# EAGLE board untitled (EAGLE 9.3.0)
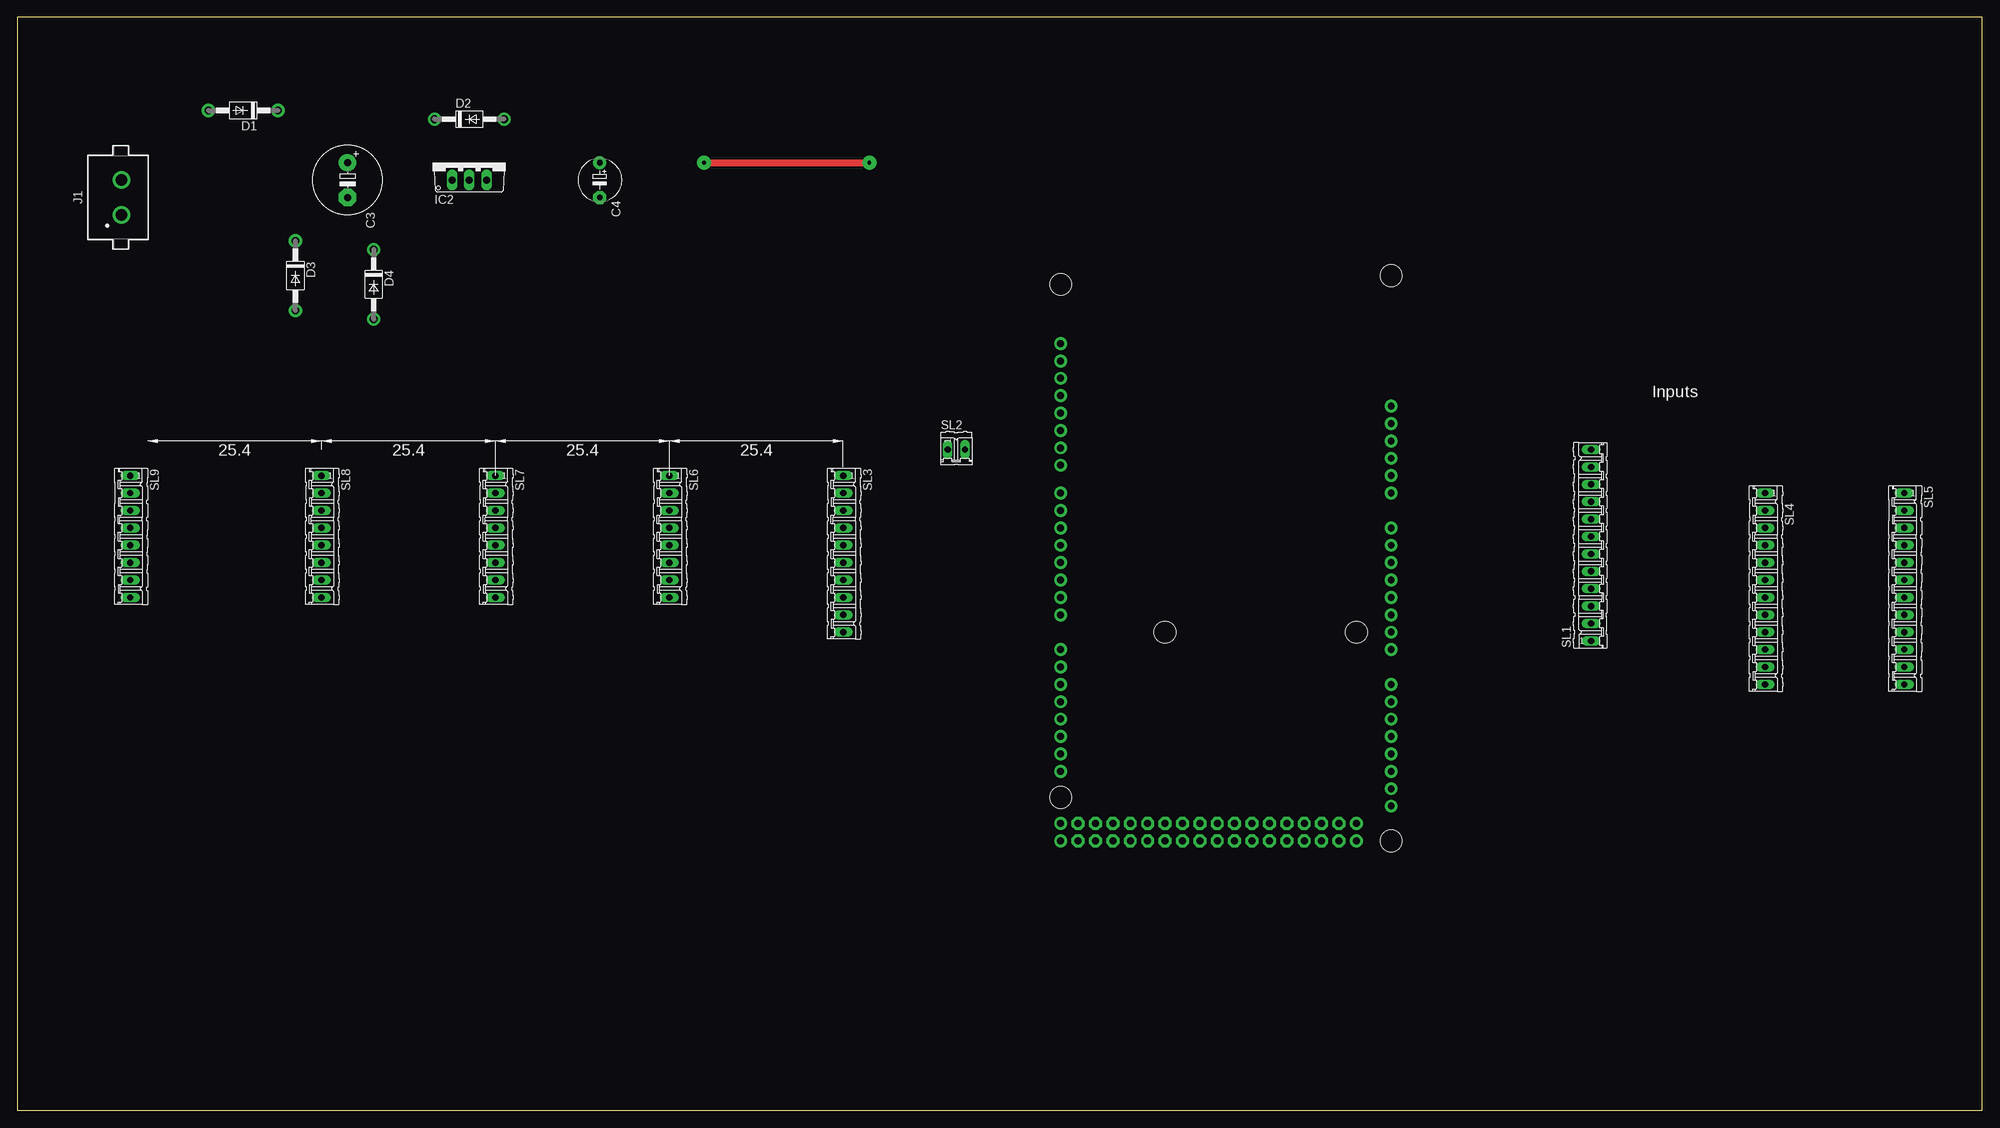
[diagram p0: board, top side]
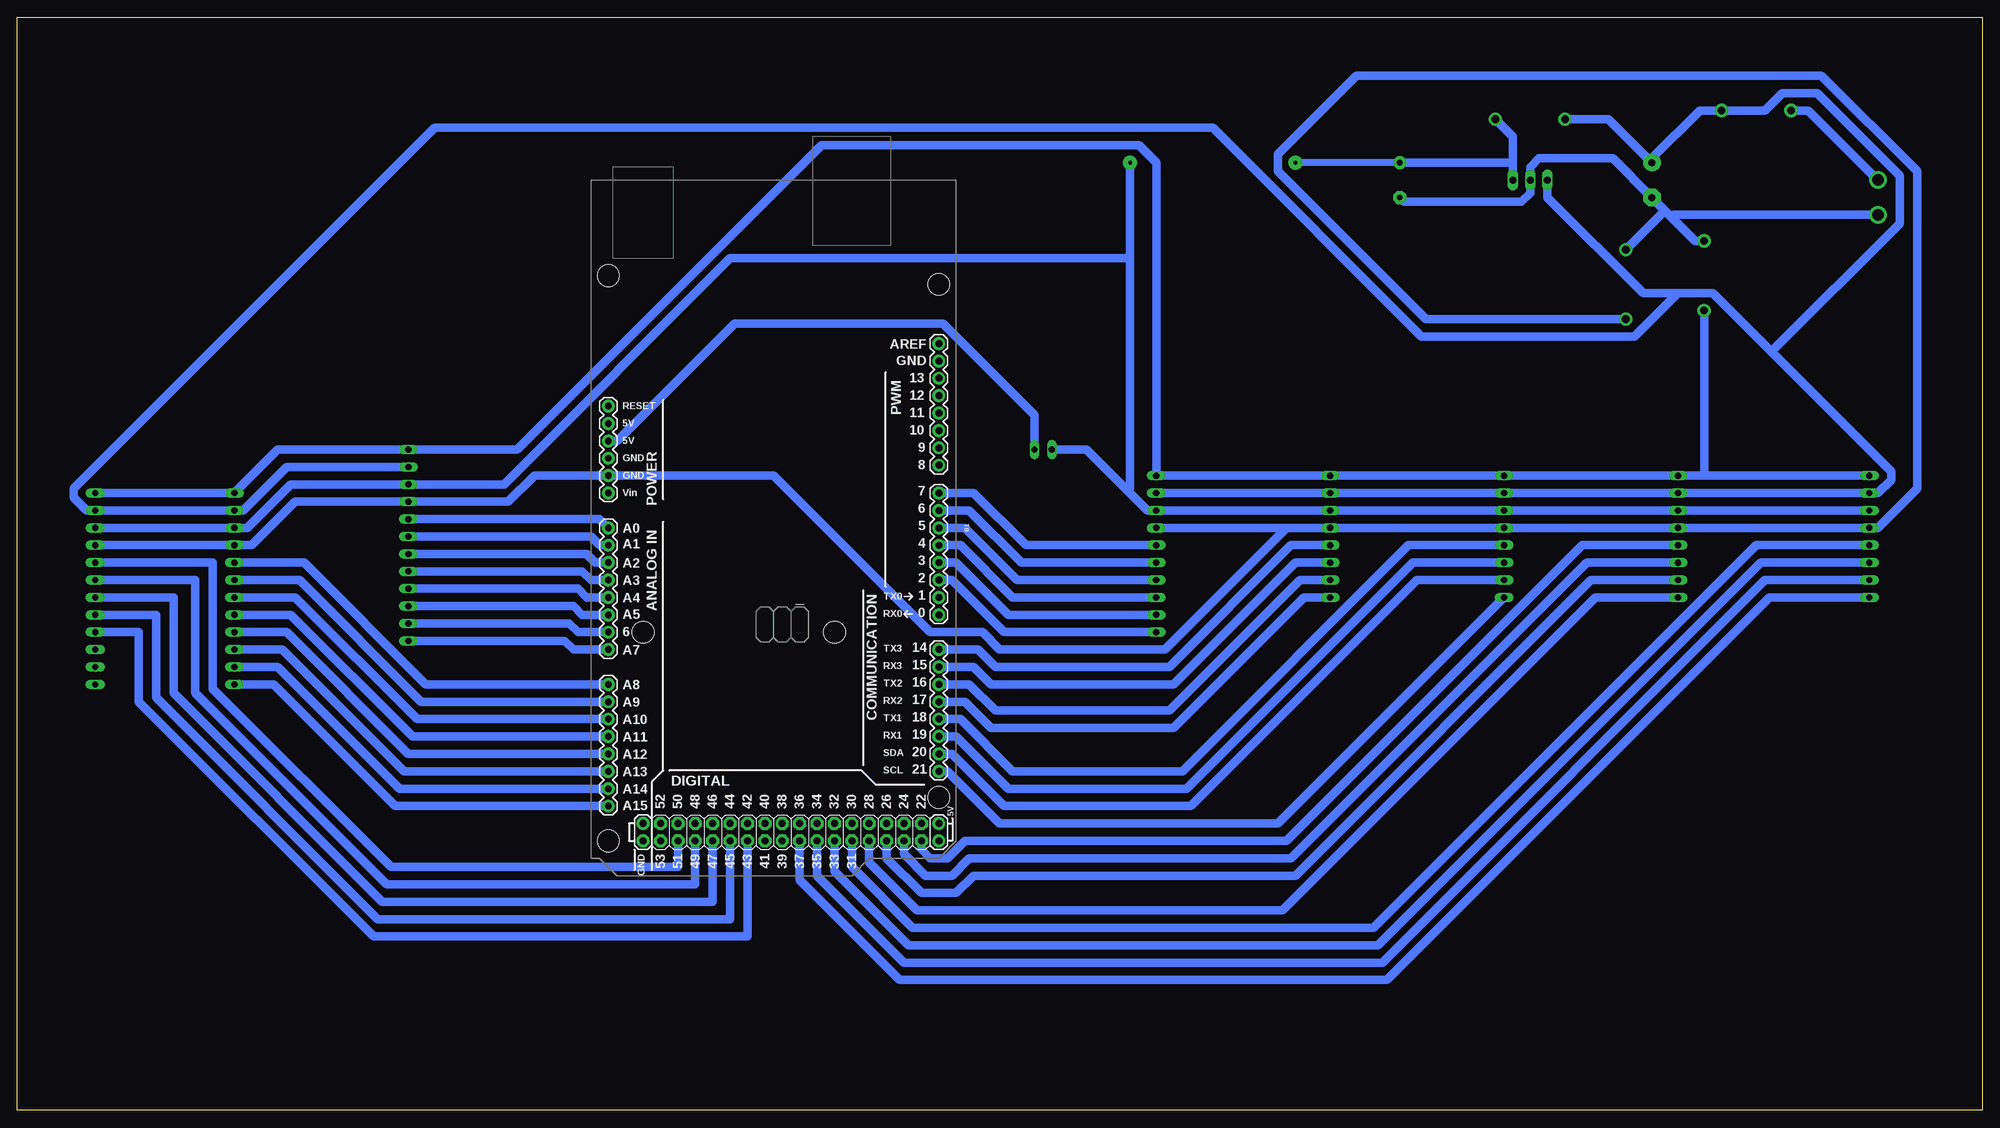
[diagram p1: board, bottom side, seen from below]

Size 287 x 159.69 mm. Coordinates in mm from the lower left corner, seen from the top.
Outline: 0,0 287,0 287,159.69 0,159.69 0,0
Copper layers (1*16): Top 0.035mm / dielectric 1.5mm / Bottom 0.035mm
Design rules "default *": minimum track width 50mil, minimum drill 0.35mm, track to track 35mil, track to pad 30mil, pad to pad 6mil, via to via 6mil, smd to smd 6mil, copper to edge 40mil, drill to drill 6mil, minimum pad ring 10mil, minimum via ring 8mil, stop-mask expansion 4mil, vias tented up to drill 0mil, thermal gap 10mil

## Footprints (pad centres in the part's own frame; a part is rotated, then mirrored left to right if it is on the bottom)
ARDUINO_MEGA = drill 1.016 pad 1.88: 0 13.97,24.13; 1 11.43,24.13; 2 8.89,24.13; 3 6.35,24.13; 3.3V -13.97,-24.13; 4 3.81,24.13; 5 1.27,24.13; 5V@0 -11.43,-24.13; 5V@1 44.45,24.13; 5V@2 46.99,24.13; 6 -1.27,24.13; 7 -3.81,24.13; 8 -7.874,24.13; 9 -10.414,24.13; 10 -12.954,24.13; 11 -15.494,24.13; 12 -18.034,24.13; 13 -20.574,24.13; 14 19.05,24.13; 15 21.59,24.13; 16 24.13,24.13; 17 26.67,24.13; 18 29.21,24.13; 19 31.75,24.13; 20 34.29,24.13; 21 36.83,24.13; A0 1.27,-24.13; A1 3.81,-24.13; A2 6.35,-24.13; A3 8.89,-24.13; A4 11.43,-24.13; A5 13.97,-24.13; A6 16.51,-24.13; A7 19.05,-24.13; A8 24.13,-24.13; A9 26.67,-24.13; A10 29.21,-24.13; A11 31.75,-24.13; A12 34.29,-24.13; A13 36.83,-24.13; A14 39.37,-24.13; A15 41.91,-24.13; AREF -25.654,24.13; GND@0 -8.89,-24.13; GND@1 -6.35,-24.13; GND@2 44.45,-19.05; GND@3 46.99,-19.05; GND@4 -23.114,24.13; RESET -16.51,-24.13; VIN -3.81,-24.13 | drill 1.016 pad 1.88 octagon: 22 44.45,21.59; 23 46.99,21.59; 24 44.45,19.05; 25 46.99,19.05; 26 44.45,16.51; 27 46.99,16.51; 28 44.45,13.97; 29 46.99,13.97; 30 44.45,11.43; 31 46.99,11.43; 32 44.45,8.89; 33 46.99,8.89; 34 44.45,6.35; 35 46.99,6.35; 36 44.45,3.81; 37 46.99,3.81; 38 44.45,1.27; 39 46.99,1.27; 40 44.45,-1.27; 41 46.99,-1.27; 42 44.45,-3.81; 43 46.99,-3.81; 44 44.45,-6.35; 45 46.99,-6.35; 46 44.45,-8.89; 47 46.99,-8.89; 48 44.45,-11.43; 49 46.99,-11.43; 50 44.45,-13.97; 51 46.99,-13.97; 52 44.45,-16.51; 53 46.99,-16.51 | hole 3.2: -34.29,24.13; -35.56,-24.13; 16.51,8.89; 16.51,-19.05; 40.64,24.13; 46.99,-24.13
E5-10,5 = drill 1.016 pad 2.54: + -2.54,0 | drill 1.016 pad 2.54 octagon: - 2.54,0
E5-6 = drill 0.813 pad 1.905: + -2.54,0 | drill 0.813 pad 1.905 octagon: - 2.54,0
DO41-10 = drill 1.118 pad 1.93: A 5.08,0; C -5.08,0
TO220V = drill 1.016 long: 1 -2.54,-2.54; 2 0,-2.54; 3 2.54,-2.54
691305530002 = drill 1.7: 1 -2.54,0; 2 2.54,0
12P = drill 0.914 long: 1 -13.97,0; 2 -11.43,0; 3 -8.89,0; 4 -6.35,0; 5 -3.81,0; 6 -1.27,0; 7 1.27,0; 8 3.81,0; 9 6.35,0; 10 8.89,0; 11 11.43,0; 12 13.97,0
02P = drill 0.914 long: 1 -1.27,0; 2 1.27,0
10P = drill 0.914 long: 1 -11.43,0; 2 -8.89,0; 3 -6.35,0; 4 -3.81,0; 5 -1.27,0; 6 1.27,0; 7 3.81,0; 8 6.35,0; 9 8.89,0; 10 11.43,0
08P = drill 0.914 long: 1 -8.89,0; 2 -6.35,0; 3 -3.81,0; 4 -1.27,0; 5 1.27,0; 6 3.81,0; 7 6.35,0; 8 8.89,0

## Placement (x,y rotation side)
B1  ARDUINO_MEGA_R3FULL  [ARDUINO_MEGA]  176.53,86.36 270 bottom
C3  [E5-10,5]  48.26,135.89 270 top
C4  [E5-6]  85.09,135.89 270 top
D1  1N4004  [DO41-10]  33.02,146.05 180 top
D2  1N4004  [DO41-10]  66.04,144.78 0 top
D3  1N4004  [DO41-10]  40.64,121.92 270 top
D4  1N4004  [DO41-10]  52.07,120.65 270 top
IC2  786TV  [TO220V]  66.04,138.43 0 top
J1  [691305530002]  15.24,133.35 90 top
SL1  [12P]  229.87,82.55 90 top
SL2  [02P]  137.16,96.52 0 top
SL3  [10P]  120.65,81.28 270 top
SL4  [12P]  255.27,76.2 270 top
SL5  [12P]  275.59,76.2 270 top
SL6  [08P]  95.25,83.82 270 top
SL7  [08P]  69.85,83.82 270 top
SL8  [08P]  44.45,83.82 270 top
SL9  [08P]  16.51,83.82 270 top

## Library data of the parts
B1 = SparkFun-Boards
C3 C4 = BeagleBone_Blue_R3
D1-D4 = adafruit
IC2 = linear
J1 = Wurth_Connectors_WR-TBL Pluggable Connector; DATASHEET-URL: https://www.we-online.com/catalog/datasheet/691305530002.pdf; IR-UL: 16A; MOUNT: THT; PART-NUMBER: 691305530002; PINS: 2; PITCH: 5.08mm; TYPE: Vertical; WORKING-VOLTAGE-UL: 300V (AC)
SL1-SL9 = con-amp-quick; OC_FARNELL: unknown; OC_NEWARK: unknown

## Nets
GND: B1.GND@1 D4.A SL1.9 SL3.4 SL4.4 SL5.4 SL6.4 SL7.4 SL8.4 SL9.4
N$1: B1.A7 SL1.1
N$2: B1.A6 SL1.2
N$3: B1.A5 SL1.3
N$4: B1.A4 SL1.4
N$5: B1.A3 SL1.5
N$6: B1.A2 SL1.6
N$7: B1.A1 SL1.7
N$8: B1.A0 SL1.8
N$9: D3.A SL1.12 SL3.1 SL4.1 SL5.1 SL6.1 SL7.1 SL8.1 SL9.1
N$10: D1.A J1.2
N$11: C3.+ D1.C D2.C IC2.1 SL1.11 SL3.2 SL4.2 SL5.2 SL6.2 SL7.2 SL8.2 SL9.2
N$12: C4.+ D2.A IC2.3 SL1.10 SL2.1 SL3.3 SL4.3 SL5.3 SL6.3 SL7.3 SL8.3 SL9.3
N$13: B1.2 SL3.10
N$14: C3.- C4.- D3.C D4.C IC2.2 J1.1
N$15: B1.3 SL3.9
N$16: B1.5V@0 SL2.2
N$17: B1.4 SL3.8
N$18: B1.5 SL3.7
N$19: B1.6 SL3.6
N$20: B1.7 SL3.5
N$21: B1.A8 SL4.5
N$22: B1.A9 SL4.6
N$23: B1.A10 SL4.7
N$24: B1.A11 SL4.8
N$25: B1.A12 SL4.9
N$26: B1.A13 SL4.10
N$27: B1.A14 SL4.11
N$28: B1.A15 SL4.12
N$29: B1.18 SL7.5
N$30: B1.14 SL6.5
N$31: B1.51 SL5.5
N$32: B1.49 SL5.6
N$33: B1.47 SL5.7
N$34: B1.45 SL5.8
N$35: B1.43 SL5.9
N$39: B1.21 SL7.8
N$40: B1.15 SL6.6
N$42: B1.17 SL6.8
N$43: B1.20 SL7.7
N$46: B1.19 SL7.6
N$49: B1.31 SL9.5
N$50: B1.33 SL9.6
N$51: B1.35 SL9.7
N$52: B1.37 SL9.8
N$53: B1.23 SL8.5
N$54: B1.25 SL8.6
N$55: B1.29 SL8.8
N$56: B1.27 SL8.7
N$57: B1.16 SL6.7

## Tracks (layer width: path | path; a pad name or v marks a point on that pad's centre or on a via)
GND
  Bottom 1.27: SL5.4 SL4.4 252.73,82.55 246.38,88.9 SL1.9 215.26,88.9 211.45,92.71 B1.GND@1 176.53,92.71 153.67,69.85 146.05,69.85 143.51,67.31 119.38,67.31 101.6,85.09 | 101.6,85.09 SL6.4 SL7.4 SL8.4 SL9.4 15.24,85.09 9.53,90.8 9.53,137.16 23.5,151.13 91.44,151.13 102.87,139.7 102.87,137.16 81.28,115.57 D4.A | 101.6,85.09 SL3.4
N$1
  Bottom 1.27: SL1.1 207.01,68.58 205.74,67.31 B1.A7
N$2
  Bottom 1.27: SL1.2 206.38,71.12 205.1,69.85 B1.A6
N$3
  Bottom 1.27: SL1.3 205.74,73.66 204.47,72.39 B1.A5
N$4
  Bottom 1.27: SL1.4 205.1,76.2 203.83,74.93 B1.A4
N$5
  Bottom 1.27: SL1.5 204.47,78.74 203.2,77.47 B1.A3
N$6
  Bottom 1.27: SL1.6 203.83,81.28 202.56,80.01 B1.A2
N$7
  Bottom 1.27: SL1.7 203.2,83.82 201.93,82.55 B1.A1
N$8
  Bottom 1.27: SL1.8 201.93,86.36 B1.A0
N$9
  Bottom 1.27: SL5.1 SL4.1 248.92,96.52 SL1.12 213.99,96.52 169.54,140.97 123.19,140.97 120.65,138.43 SL3.1 SL6.1 SL7.1 SL8.1 40.64,92.71 | 40.64,92.71 SL9.1 | 40.64,92.71 D3.A
N$10
  Bottom 1.27: D1.A 25.4,146.05 J1.2
N$11
  Bottom 1.27: SL1.11 247.65,93.98 254,87.63 SL4.2 SL5.2 276.86,87.63 278.76,89.53 278.76,90.8 226.06,143.51 112.4,143.51 81.92,113.03 50.8,113.03 44.45,119.38 | D2.C 54.61,144.78 C3.+ 48.26,139.06 41.27,146.05 D1.C 31.75,146.05 29.21,148.59 24.13,148.59 12.07,136.53 12.07,129.54 30.8,110.81 | SL3.2 SL6.2 SL7.2 SL8.2 SL9.2 15.24,90.17 13.34,92.07 13.34,93.34 30.8,110.81 | IC2.1 63.5,133.35 49.53,119.38 44.45,119.38 | 44.45,119.38 39.37,119.38 30.8,110.81
N$12  (via drill 0.55 pad 2.03)
  Top 1.016: v100.33,138.43 v124.46,138.43
  Bottom 1.016: C4.+ v100.33,138.43
  Bottom 1.27: SL5.3 SL4.3 253.36,85.09 247.01,91.44 SL1.10 215.9,91.44 182.88,124.46 124.46,124.46 | 68.58,138.43 68.58,142.24 D2.A | 68.58,138.43 IC2.3 | C4.+ 68.58,138.43 | SL9.3 SL8.3 SL7.3 SL6.3 SL3.3 121.92,87.63 124.78,90.49 | SL2.1 130.81,96.52 124.78,90.49 | 124.46,124.46 124.46,90.8 124.78,90.49 | 124.46,124.46 v124.46,138.43
N$13
  Bottom 1.27: SL3.10 142.88,69.85 150.5,77.47 B1.2
N$14
  Bottom 1.27: C4.- 84.45,132.72 67.31,132.72 66.04,133.99 IC2.2 66.04,137.79 64.77,139.06 53.98,139.06 C3.- 46.36,131.44 | D3.C 41.91,127 45.4,130.49 | 46.36,131.44 45.4,130.49 | 46.36,131.44 D4.C | J1.1 45.09,130.81 45.4,130.49
N$15
  Bottom 1.27: SL3.9 142.24,72.39 149.86,80.01 B1.3
N$16
  Bottom 1.27: SL2.2 138.43,101.6 151.76,114.94 182.24,114.94 199.39,97.79 B1.5V@0
N$17
  Bottom 1.27: SL3.8 141.6,74.93 149.22,82.55 B1.4
N$18
  Bottom 1.27: SL3.7 140.97,77.47 148.59,85.09 B1.5
N$19
  Bottom 1.27: SL3.6 140.34,80.01 147.95,87.63 B1.6
N$20
  Bottom 1.27: SL3.5 139.7,82.55 147.32,90.17 B1.7
N$21
  Bottom 1.27: SL4.5 245.11,80.01 227.33,62.23 B1.A8
N$22
  Bottom 1.27: SL4.6 245.74,77.47 227.97,59.69 B1.A9
N$23
  Bottom 1.27: SL4.7 246.38,74.93 228.6,57.15 B1.A10
N$24
  Bottom 1.27: SL4.8 247.01,72.39 229.23,54.61 B1.A11
N$25
  Bottom 1.27: SL4.9 247.65,69.85 229.87,52.07 B1.A12
N$26
  Bottom 1.27: SL4.10 248.28,67.31 230.5,49.53 B1.A13
N$27
  Bottom 1.27: SL4.11 248.92,64.77 231.14,46.99 B1.A14
N$28
  Bottom 1.27: SL4.12 249.55,62.23 231.77,44.45 B1.A15
N$29
  Bottom 1.27: SL7.5 83.82,82.55 116.84,49.53 141.6,49.53 149.22,57.15 B1.18
N$30
  Bottom 1.27: SL6.5 100.97,82.55 118.75,64.77 144.15,64.77 146.69,67.31 B1.14
N$31
  Bottom 1.27: SL5.5 258.44,80.01 258.44,61.59 232.41,35.56 190.5,35.56 B1.51
N$32
  Bottom 1.27: SL5.6 260.99,77.47 260.99,60.96 233.04,33.02 187.96,33.02 B1.49
N$33
  Bottom 1.27: SL5.7 264.16,74.93 264.16,60.96 233.68,30.48 185.42,30.48 B1.47
N$34
  Bottom 1.27: SL5.8 266.7,72.39 266.7,60.32 234.31,27.94 182.88,27.94 B1.45
N$35
  Bottom 1.27: SL5.9 269.24,69.85 269.24,59.69 234.95,25.4 180.34,25.4 B1.43
N$39
  Bottom 1.27: SL7.8 102.87,41.91 143.51,41.91 151.13,49.53 B1.21
N$40
  Bottom 1.27: SL6.6 100.33,80.01 118.11,62.23 144.78,62.23 147.32,64.77 B1.15
N$42
  Bottom 1.27: SL6.8 99.06,74.93 118.11,55.88 144.78,55.88 148.59,59.69 B1.17
N$43
  Bottom 1.27: SL7.7 82.55,77.47 115.57,44.45 142.88,44.45 150.5,52.07 B1.20
N$46
  Bottom 1.27: SL7.6 83.19,80.01 116.2,46.99 142.24,46.99 149.86,54.61 B1.19
N$49
  Bottom 1.27: SL9.5 33.02,82.55 88.9,26.67 156.21,26.67 165.1,35.56 B1.31
N$50
  Bottom 1.27: SL9.6 32.38,80.01 88.27,24.13 156.84,24.13 167.64,34.92 B1.33
N$51
  Bottom 1.27: SL9.7 31.75,77.47 87.63,21.59 157.48,21.59 170.18,34.29 B1.35
N$52
  Bottom 1.27: SL9.8 31.12,74.93 87,19.05 158.12,19.05 172.72,33.65 B1.37
N$53
  Bottom 1.27: SL8.5 58.42,82.55 101.6,39.37 148.59,39.37 151.13,36.83 153.67,36.83 154.94,38.1 B1.23
N$54
  Bottom 1.27: SL8.6 57.78,80.01 100.97,36.83 147.95,36.83 150.5,34.29 154.31,34.29 157.48,37.46 B1.25
N$55
  Bottom 1.27: SL8.8 56.52,74.93 102.23,29.21 155.57,29.21 162.56,36.19 B1.29
N$56
  Bottom 1.27: SL8.7 57.15,77.47 100.33,34.29 147.32,34.29 149.86,31.75 154.94,31.75 160.02,36.83 B1.27
N$57
  Bottom 1.27: SL6.7 99.7,77.47 118.75,58.42 144.15,58.42 147.95,62.23 B1.16

## Text on the board
tNames: Inputs